# Altium PCB PCB3.PcbDoc
Units mil, origin at the board's own origin, x right, y up, seen from the top; angles counter-clockwise.
Board outline 3543.31 x 1799.21 mil, 2 copper layers (Top Layer, Bottom Layer); 13 components, 0 nets, 57 pads, 0 vias.
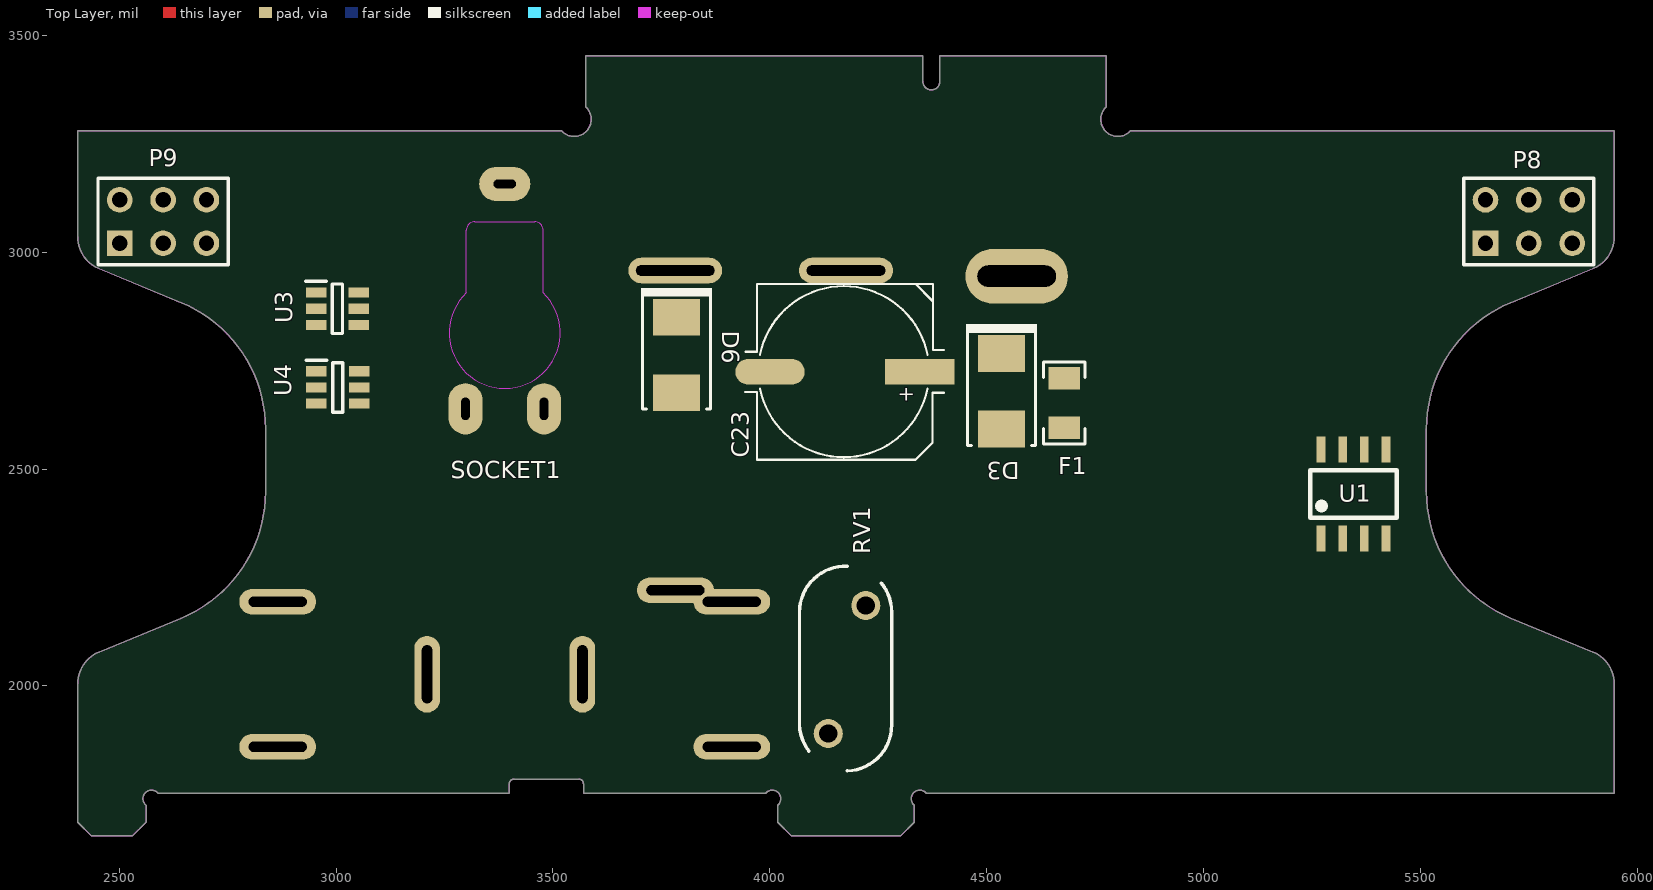
[diagram p0: Top Layer view]
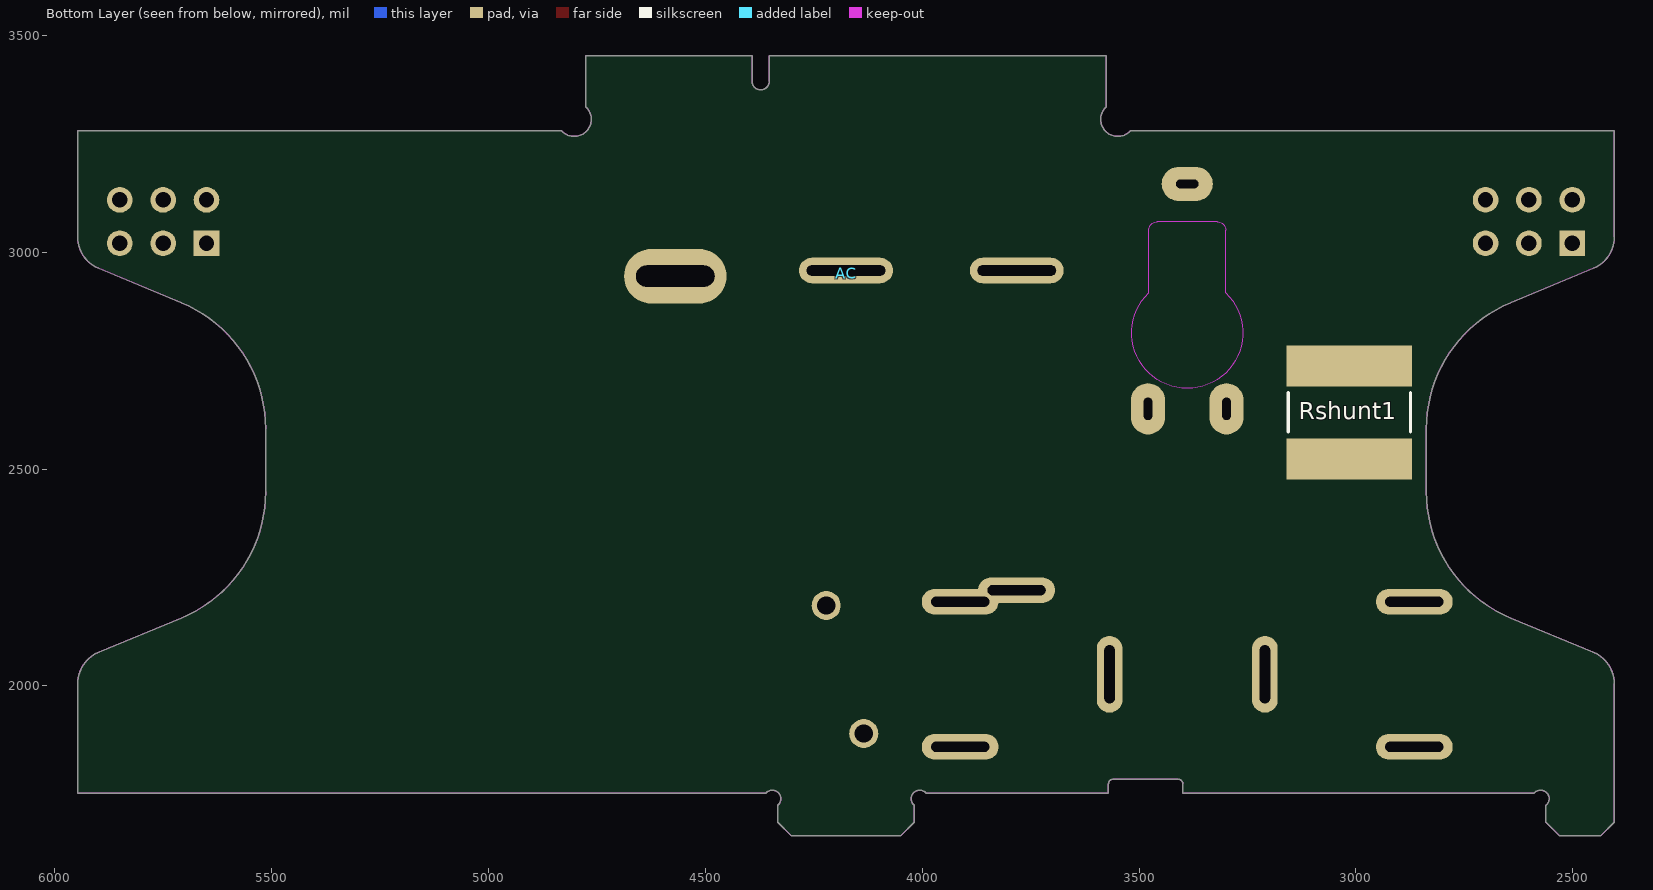
[diagram p1: Bottom Layer view, seen from below]

## Layer stack, top to bottom
Top Solder: solder mask 0.4, Solder Resist, Dk 3.5
Top Layer: signal copper 1.4
Dielectric 1: dielectric 12.6, FR-4, Dk 4.8
Bottom Layer: signal copper 1.4
Bottom Solder: solder mask 0.4, Solder Resist, Dk 3.5

## Board outline
2404.29,1685.47 2435.79,1653.98 2530.28,1653.98 2561.77,1685.47 2561.77,1724.69 cw(c2574.3,1739.87) 2589.48,1752.4 3399.37,1752.4 3399.37,1774.05 cw(c3410.39,1774.05) 3410.39,1785.08 3559.61,1785.08 cw(c3559.61,1774.05) 3570.63,1774.05 3570.63,1752.4 3990.75,1752.4 cw(c4005.94,1739.87) 4018.47,1724.69 4018.47,1685.47 4049.96,1653.98 4301.93,1653.98 4333.43,1685.47 4333.43,1724.69 cw(c4345.95,1739.87) 4361.14,1752.4 5947.6,1752.4 5947.6,2004.91 ccw(c5868.86,2004.91) 5898.99,2077.65 5708.96,2156.37 cw(c5829.49,2447.35) 5514.53,2447.35 5514.53,2592.88 cw(c5829.49,2592.88) 5708.96,2883.87 5898.99,2962.58 ccw(c5868.86,3035.33) 5947.6,3035.33 5947.6,3279.96 4831.95,3279.96 cw(c4802.79,3306.41) 4776.34,3335.57 4776.34,3453.19 4392.48,3453.19 4392.48,3394.13 cw(c4372.8,3394.13) 4353.11,3394.13 4353.11,3453.19 3575.55,3453.19 3575.55,3335.57 cw(c3549.1,3306.41) 3519.94,3279.96 2404.29,3279.96 2404.29,3035.33 ccw(c2483.03,3035.33) 2452.9,2962.58 2642.93,2883.87 cw(c2522.4,2592.88) 2837.36,2592.88 2837.36,2447.35 cw(c2522.4,2447.35) 2642.93,2156.37 2452.9,2077.65 ccw(c2483.03,2004.91) 2404.29,2004.91

## Design rules (kind name [scope] priority, off if disabled: settings)
Clearance [All] p1: gap=10
PolygonConnect [All] p1: connectstyle=Relief reliefconductorwidth=10 reliefentries=4 polygonreliefangle="90 Angle" airgapwidth=10
RoutingVias [All] p1: holewidth=28 width=50 viastyle="Through Hole" minholewidth=28 minwidth=50 maxholewidth=28 maxwidth=50
SolderMaskExpansion [All] p1: expansion=4
Width [All] p1: maxlimit=10 minlimit=10 preferedwidth=10
30 further rules are at their usual default settings.

## Components (designator, comment, footprint, x,y, rotation, side; value= is the part's Value field where it differs from the comment)
AC "Header 3" CHAN3DONGTO 4175.91,2957.83 r0 bottom
C23 "400AX6R8M8x11" PANACAP-G-GENERIC 4170.71,2724.25 r180 top
D3 "US1M-13-F" SMB 4534.33,2679.21 r90 top
D6 "US1M-13-F" SMB 3785.08,2762.99 r90 top
F1 "Res" 1206 4679.49,2652.28 r270 top
P8 "Header 3X2" HDR2X3 5650.63,3020.75 r0 top
P9 "Header 3X2" HDR2X3 2501.1,3020.79 r0 top
Rshunt1 "0.006R" RESC2728 3014.92,2630.71 r90 bottom
RV1 "S10K275E2" VAR_S10K275E2 4175,2040 r90 top
SOCKET1 "Header 3" SOCKET 3389.01,3157.48 r0 top locked
U1 "LM358 SOP8_MH" "SOP 8" 5346.22,2442.28 r0 top
U3 "INA181A4IDBVT" SOT95P280X145-6N 3003.15,2869.72 r0 top
U4 "INA181A1IDBVT" SOT95P280X145-6N 3003.78,2688.39 r0 top

## Footprints (in the part's own frame and the unit in brackets; to place one, negate y for a bottom-side part, rotate by r counter-clockwise, add the part's x,y. Pads: shape width x height; smd on the part's side, far side on the other; paste and mask are expansions set on the pad)
1206 [mm] "1206 from SM-752 data"
  rect 1.3x1.85 smd: 1(1.45,0) 2(-1.45,0)
  silkscreen extent -2.4,-1.21 2.4,1.21, body extent -1.7,-0.9 1.7,0.9, height 1.35
CHAN3DONGTO [mm]
  oval 5.5x1.5 hole 0.6 slot 4.6 at 0 deg: 1(-10,0) 2(0,0)
  oval 6x3.2 hole 1.25 slot 4.6 at 0 deg: 3(10,0.33)
  body extent -13,-5.15 13,0.25, height 10.4
HDR2X3 [mm] "Connector; Header; 3x2 Position"
  rect 1.5x1.5 hole 0.9: 1(0,0)
  round 1.5 hole 0.9: 2(0,2.54) 3(2.54,0) 4(2.54,2.54) 5(5.08,0) 6(5.08,2.54)
  silkscreen extent -1.27,-1.27 6.35,3.81
PANACAP-G-GENERIC [mil]
  rect 160x59.06 smd: 1(-175,0)
  oval 160x59.06 smd: 2(170,0)
  silkscreen extent -231,-203 227,203, body extent -233,-203 223,203, height 402
RESC2728 [mm] "Chip Resistor, 2-Leads, Body 6.9x7.1mm, IPC Medium Density"
  rect 2.4x7.35 smd: 1(-2.725,0) 2(2.725,0)
  silkscreen extent -1.15,-3.58 1.15,3.57, body extent -3.55,-3.65 3.55,3.65, height 0.6
SMB [mil] "Molded Diode, 2-Leads, Body 5.4x3.6mm, IPC Medium Density, based on OnSemi component dimensions"
  rect 85x107.99 smd: 1(87.01,0) 2(-87.01,0)
  silkscreen extent -125,-82 155,82, body extent -106,-71 106,71, height 91
SOCKET [mm]
  oval 4.5x1.5 hole 0.6 slot 3.4 at 0 deg: 1(-13.3,-24.471) 1(-13.3,-32.971) 2(10,-23.795) 2(13.3,-32.971) 2(13.3,-24.471)
  oval 1.5x4.5 hole 0.6 slot 3.4 at 90 deg: 1(-4.55,-28.72) 2(4.55,-28.72)
  oval 2x3 hole 0.5 slot 1.3 at 90 deg: 3(-2.3,-13.17) 3(2.3,-13.17)
  oval 3x2 hole 0.5 slot 1.3 at 0 deg: 3(0,0.001)
  Keep-Out Layer lines w0.013: -2.25,-6.375 ccw(c0,-8.72) 2.25,-6.375 2.25,-2.72 ccw(c1.75,-2.72) 1.75,-2.22 -1.75,-2.22 ccw(c-1.75,-2.72) -2.25,-2.72 -2.25,-6.375
  body extent -14.74,-33.27 14.86,0.15, height 14.21
"SOP 8" [mil]
  rect 20x60 smd: 1(-75,-102.5) 2(-25,-102.5) 3(25,-102.5) 4(75,-102.5) 5(75,102.5) 6(25,102.5) 7(-25,102.5) 8(-75,102.5)
  silkscreen extent -100,-55 100,55, body extent -98,-120 100,117, height 63
SOT95P280X145-6N [mm]
  rect 1.2x0.6 smd: 1(-1.25,0.95) 2(-1.25,0) 3(-1.25,-0.95) 4(1.25,-0.95) 5(1.25,0) 6(1.25,0.95)
  silkscreen extent -1.85,-1.45 0.3,1.6, body extent -1.4,-1.45 1.4,1.45, height 1.45
VAR_S10K275E2 [mm] "EPCOS"
  round 1.7 hole 1.067: 1(-3.81,1.016) 2(3.69,-1.184)
  silkscreen extent -6,-2.7 6,2.7, body extent -6.02,-2.7 5.98,2.7, height 15

## Part data
AC SOCKET1: "Header, 3-Pin"
C23: "CAP, AL, 6.8uF, 400V, +/-20%, TH"
D3 D6: library part MURS160-13-F, "Diode, Ultrafast, 600V, 1A, SMB"
F1: library part Res-SMD, "Resistor"
P8 P9: "Header, 3-Pin, Dual row"
Rshunt1: library part R, "Resistor 1/4W"
RV1: "Varistor 275V RMS 10MM Radial, TH"
U3 U4: library part INA181

## Nets (pads, with @x,y where several pads share a name; then routed paths per layer and width w, separated by ;. In a path a pad name is that pad's centre, name@x,y a point inside that pad or via, vN(x,y) a via of type N, cw(c..) or ccw(c..) an arc to the next point about the centre after c; other vN are vias at no path point)
pads on no net: AC.1 AC.2 AC.3 C23.1 C23.2 D3.1 D3.2 D6.1 D6.2 F1.1 F1.2 P8.1 P8.2 P8.3 P8.4 P8.5 P8.6 P9.1 P9.2 P9.3 P9.4 P9.5 P9.6 Rshunt1.1 Rshunt1.2 RV1.1 RV1.2 SOCKET1.1 SOCKET1.2 SOCKET1.3 U1.1 U1.2 U1.3 U1.4 U1.5 U1.6 U1.7 U1.8 U3.1 U3.2 U3.3 U3.4 U3.5 U3.6 U4.1 U4.2 U4.3 U4.4 U4.5 U4.6

## Keep-outs
Keep-Out Layer:
  the board outline again, w0.5

## Silkscreen, mask and mechanical layers (free items; w line width, h text height)
Mechanical 13:
  drawing of 312 lines, arcs and shapes, not listed

## Text inside footprints (layer, text, board x,y; h text height)
C23: Top Overlay "+" at 4336.06,2685.87 h35 r180